# EAGLE board m7102 (EAGLE 4.11)
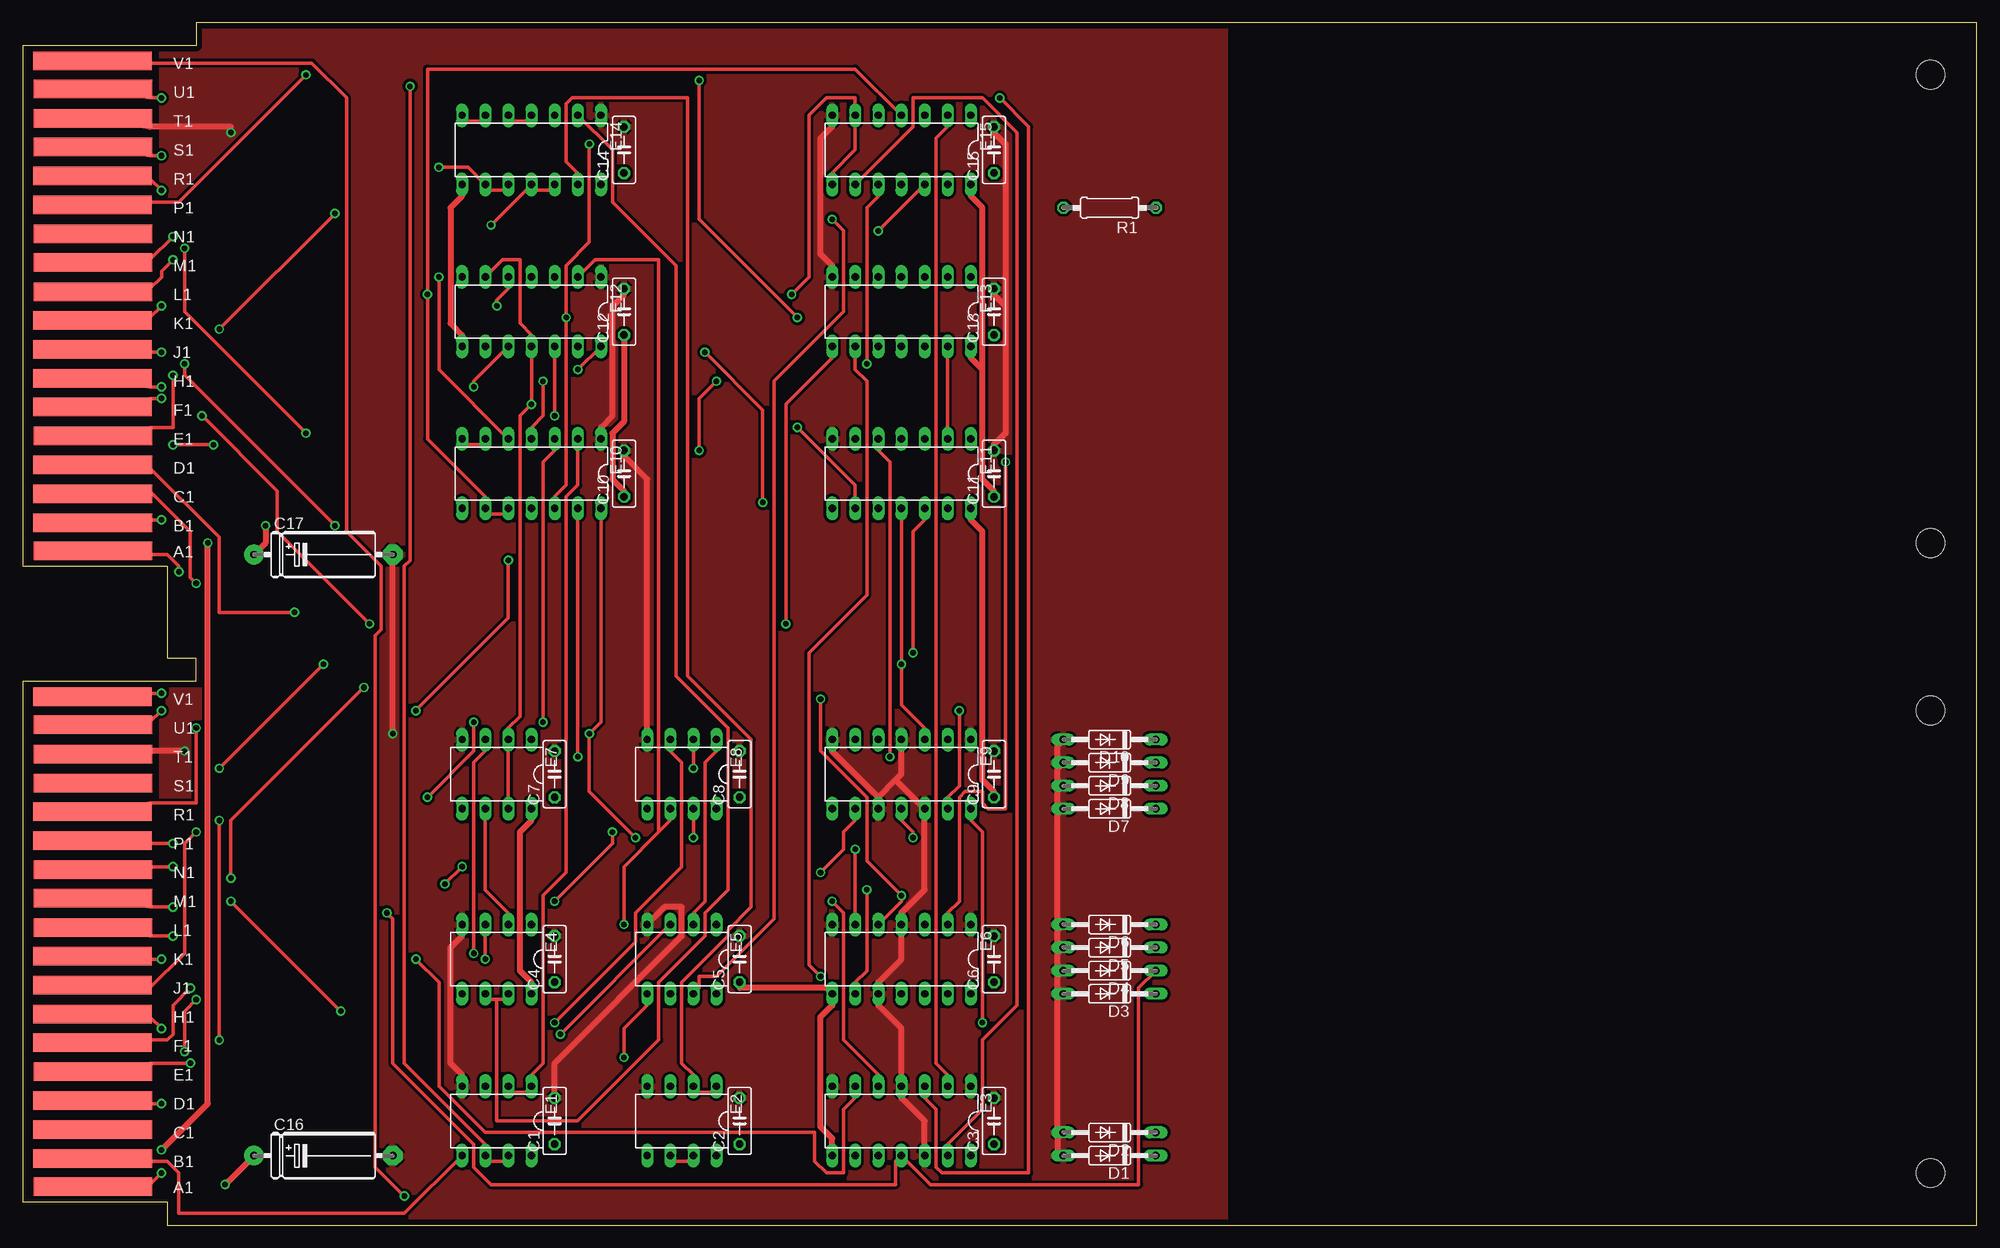
[diagram p0: board, top side]
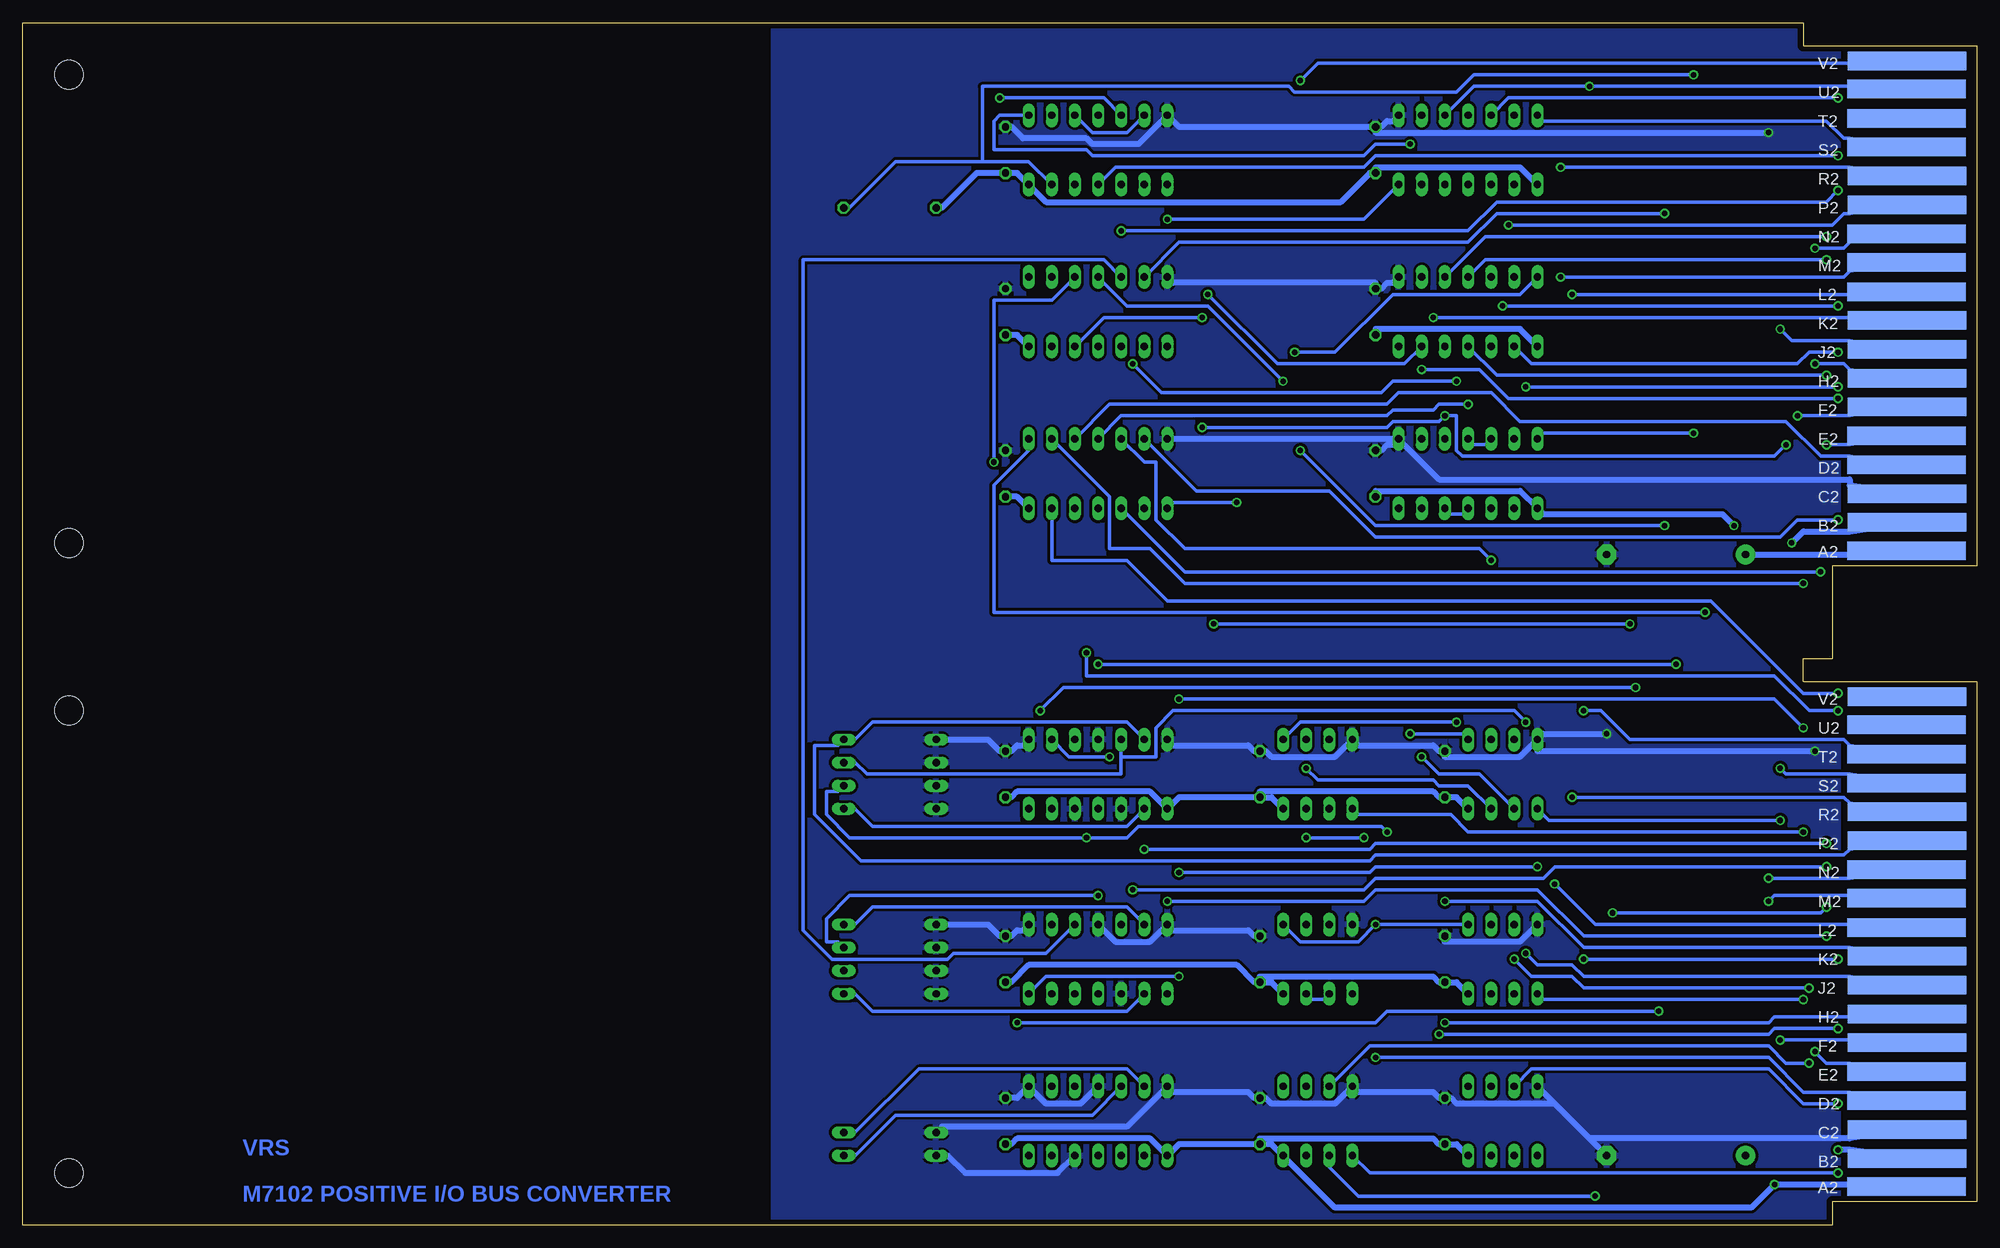
[diagram p1: board, bottom side, seen from below]

Size 214.63 x 132.08 mm. Coordinates in mm from the lower left corner, seen from the top.
Copper layers (1*16): Top 0.035mm / dielectric 1.5mm / Bottom 0.035mm
Design rules "15mils": minimum track width 15mil, minimum drill 24mil, track to track 12mil, track to pad 10mil, pad to pad 10mil, via to via 10mil, smd to smd 10mil, copper to edge 25mil, drill to drill 10mil, minimum pad ring 10mil, minimum via ring 8mil, stop-mask expansion 0mil, vias tented up to drill 0mil, thermal gap 10mil
Net classes: 1 Supply: width 0.635 mm

## Footprints (pad centres in the part's own frame; a part is rotated, then mirrored left to right if it is on the bottom)
C050-025X075 = drill 0.813 octagon: 1 -2.54,0; 2 2.54,0
E15-5 = drill 0.813 pad 2.159 round: + -7.62,0 | drill 0.813 pad 2.159 octagon: - 7.62,0
DO35-10 = drill 0.813 long: A 5.08,0; C -5.08,0
DIL08 = drill 0.813 long: 1 -3.81,-3.81; 2 -1.27,-3.81; 3 1.27,-3.81; 4 3.81,-3.81; 5 3.81,3.81; 6 1.27,3.81; 7 -1.27,3.81; 8 -3.81,3.81
DIL14 = drill 0.813 long: 1 -7.62,-3.81; 2 -5.08,-3.81; 3 -2.54,-3.81; 4 0,-3.81; 5 2.54,-3.81; 6 5.08,-3.81; 7 7.62,-3.81; 8 7.62,3.81; 9 5.08,3.81; 10 2.54,3.81; 11 0,3.81; 12 -2.54,3.81; 13 -5.08,3.81; 14 -7.62,3.81
EDGE-CON4 = smd 13.017 x 2.032: AA1 7.709,4.207; AB1 7.684,7.312; AC1 7.684,10.474; AD1 7.684,13.665; AE1 7.693,16.84; AF1 7.668,20.041; AH1 7.668,23.19; AJ1 7.668,26.34; AK1 7.668,29.515; AL1 7.693,32.69; AM1 7.693,35.89; AN1 7.693,39.04; AP1 7.668,42.24; AR1 7.668,45.39; AS1 7.693,48.565; AT1 7.693,51.74; AU1 7.693,54.94; AV1 7.668,58.026; BA1 7.709,74.057; BB1 7.684,77.162; BC1 7.684,80.324; BD1 7.684,83.515; BE1 7.693,86.69; BF1 7.668,89.891; BH1 7.668,93.04; BJ1 7.668,96.19; BK1 7.668,99.365; BL1 7.693,102.54; BM1 7.693,105.74; BN1 7.693,108.89; BP1 7.668,112.09; BR1 7.668,115.24; BS1 7.693,118.415; BT1 7.693,121.59; BU1 7.693,124.79; BV1 7.668,127.876 | smd 13.017 x 2.032 bottom: AA2 7.69,4.207; AB2 7.668,7.328; AC2 7.668,10.49; AD2 7.693,13.665; AE2 7.693,16.84; AF2 7.642,20.041; AH2 7.642,23.19; AJ2 7.668,26.34; AK2 7.668,29.515; AL2 7.693,32.69; AM2 7.693,35.89; AN2 7.693,39.04; AP2 7.668,42.24; AR2 7.668,45.39; AS2 7.693,48.565; AT2 7.693,51.74; AU2 7.693,54.966; AV2 7.668,58.026; BA2 7.69,74.057; BB2 7.668,77.178; BC2 7.668,80.34; BD2 7.693,83.515; BE2 7.693,86.69; BF2 7.642,89.891; BH2 7.642,93.04; BJ2 7.668,96.19; BK2 7.668,99.365; BL2 7.693,102.54; BM2 7.693,105.74; BN2 7.693,108.89; BP2 7.668,112.09; BR2 7.668,115.24; BS2 7.693,118.415; BT2 7.693,121.59; BU2 7.693,124.816; BV2 7.668,127.876
0207/10 = drill 0.813 octagon: 1 -5.08,0; 2 5.08,0
DOUBLE-LONG = hole 3.175: 209.55,56.515; 209.55,5.715; 209.55,74.93; 209.55,126.365

## Placement (x,y rotation side)
C1  .01uf  [C050-025X075]  58.42,11.43 90 top
C2  .01uf  [C050-025X075]  78.74,11.43 90 top
C3  .01uf  [C050-025X075]  106.68,11.43 90 top
C4  .01uf  [C050-025X075]  58.42,29.21 90 top
C5  .01uf  [C050-025X075]  78.74,29.21 90 top
C6  .01uf  [C050-025X075]  106.68,29.21 90 top
C7  .01uf  [C050-025X075]  58.42,49.53 90 top
C8  .01uf  [C050-025X075]  78.74,49.53 90 top
C9  .01uf  [C050-025X075]  106.68,49.53 90 top
C10  .01uf  [C050-025X075]  66.04,82.55 90 top
C11  .01uf  [C050-025X075]  106.68,82.55 90 top
C12  .01uf  [C050-025X075]  66.04,100.33 90 top
C13  .01uf  [C050-025X075]  106.68,100.33 90 top
C14  .01uf  [C050-025X075]  66.04,118.11 90 top
C15  .01uf  [C050-025X075]  106.68,118.11 90 top
C16  6.8uf  [E15-5]  33.02,7.62 0 top
C17  6.8uf  [E15-5]  33.02,73.66 0 top
D1  D664  [DO35-10]  119.38,7.62 180 top
D2  D664  [DO35-10]  119.38,10.16 180 top
D3  D664  [DO35-10]  119.38,25.4 180 top
D4  D664  [DO35-10]  119.38,27.94 180 top
D5  D664  [DO35-10]  119.38,30.48 180 top
D6  D664  [DO35-10]  119.38,33.02 180 top
D7  D664  [DO35-10]  119.38,45.72 180 top
D8  D664  [DO35-10]  119.38,48.26 180 top
D9  D664  [DO35-10]  119.38,50.8 180 top
D10  D664  [DO35-10]  119.38,53.34 180 top
E1  DS75452N  [DIL08]  52.07,11.43 180 top
E2  DS75452N  [DIL08]  72.39,11.43 180 top
E3  SP384N  [DIL14]  96.52,11.43 180 top
E4  DS75452N  [DIL08]  52.07,29.21 180 top
E5  DS75452N  [DIL08]  72.39,29.21 180 top
E6  SP384N  [DIL14]  96.52,29.21 180 top
E7  DS75452N  [DIL08]  52.07,49.53 180 top
E8  DS75452N  [DIL08]  72.39,49.53 180 top
E9  SP384N  [DIL14]  96.52,49.53 180 top
E10  SP380N  [DIL14]  55.88,82.55 180 top
E11  74H04N  [DIL14]  96.52,82.55 180 top
E12  SP380N  [DIL14]  55.88,100.33 180 top
E13  7416N  [DIL14]  96.52,100.33 180 top
E14  SP380N  [DIL14]  55.88,118.11 180 top
E15  DS8881N  [DIL14]  96.52,118.11 180 top
EDGE  [EDGE-CON4]  0,0 0 top
R1  3.3K  [0207/10]  119.38,111.76 180 top
U$3  OUTLINE-DOUBLE-LONG  [DOUBLE-LONG]  0,0 0 top

## Library data of the parts
C1-C17 R1 = rcl
D1-D10 = diode
E1 E2 E4 E5 E7 E8 E11 E13 = 74xx-jameco
E3 E6 E9 E10 E12 E14 E15 EDGE U$3 = dec-con

## Nets
-15V [Supply]: EDGE.AB2 EDGE.BB2
AN1: D3.C E6.9 EDGE.AN1
AP1: D6.C E6.6 EDGE.AP1
AR1: D5.C E6.5 EDGE.AR1
BAC2D: E12.13 E15.3 E15.6 E15.8
BD2: E11.3 EDGE.BD2
BE2: E11.9 E12.12 EDGE.BE2
D2AC: E4.1 E5.1 E8.6 E12.2
D2DATA: E7.2 E7.7 E8.2 E11.4 E12.6 E12.11 EDGE.BE1
GND [Supply]: C1.2 C2.2 C3.2 C4.2 C5.2 C6.2 C7.2 C8.2 C9.2 C10.2 C11.2 C12.2 C13.2 C14.2 C15.2 C16.- C17.- D1.A D2.A D3.A D4.A D5.A D6.A D7.A D8.A D9.A D10.A E1.4 E2.4 E3.1 E3.4 E3.7 E3.12 E4.4 E5.4 E6.1 E6.4 E6.7 E6.10 E7.4 E8.4 E9.1 E9.4 E9.7 E9.10 E9.12 E10.1 E11.7 E12.1 E13.7 E14.1 E15.7 EDGE.AC2 EDGE.AT1 EDGE.BC2 EDGE.BT1
N$1: D4.C E3.11 EDGE.AM1
N$2: D1.C E3.5 EDGE.AL1
N$3: D2.C E3.6 EDGE.AK1
N$4: E3.2 E15.2
N$5: E3.3 E15.5
N$6: E3.13 E15.9
N$7: E6.14 E13.9
N$8: E6.2 E13.3
N$9: E6.3 E13.5
N$10: E4.3 EDGE.AF1
N$11: E7.5 EDGE.AF2
N$12: E8.5 EDGE.AJ1
N$13: E11.8 E12.7
N$14: D7.C E9.9 EDGE.AL2
N$15: E10.4 E10.5 E15.10 EDGE.BM2
N$16: E10.9 E10.10 E15.4 EDGE.BL2
N$17: E10.11 E10.12 E15.1 EDGE.BK2
N$18: E13.6 EDGE.BJ2
N$19: E13.4 EDGE.BH2
N$20: E13.8 EDGE.BF2
N$21: E4.2 E7.6 E10.13
N$22: E7.1 E8.7 E10.14
N$23: E5.2 E8.1 E10.3
N$24: E9.14 EDGE.AM2
N$25: D10.C E9.6 EDGE.AP2
N$26: E5.3 EDGE.AH1
N$27: E7.3 EDGE.AJ2
N$28: E8.3 EDGE.AH2
N$29: E1.5 EDGE.AB1
N$30: E1.3 EDGE.AD1
N$31: E2.3 EDGE.AE1
N$32: E5.5 EDGE.AD2
N$33: E4.5 EDGE.AE2
N$34: E2.5 EDGE.AA1
N$35: D9.C E9.5 EDGE.AR2
N$36: D8.C E9.11 EDGE.AK2
N$37: E9.13 EDGE.AN2
N$38: E1.6 E1.7 E14.3 EDGE.BU2
N$39: E1.1 E1.2 E10.2
N$40: E14.4 E14.5 EDGE.BU1
N$41: E10.6 E10.7 EDGE.BN2
N$66: E2.1 E2.2 E14.13
N$67: E5.6 E5.7 E14.14
N$68: E2.6 E2.7 EDGE.BV1
N$69: E4.6 E4.7 E14.2
N$70: E14.6 E14.7 EDGE.BS2
N$71: E14.9 E14.10 EDGE.BR2
N$72: E14.11 E14.12 EDGE.BP2
N$74: E9.2 E11.5 EDGE.AT2
N$78: E9.3 E11.11 EDGE.AS2
N$88: E11.6 EDGE.BB1
N$89: E11.10 EDGE.BA1
N$91: E12.4 EDGE.BL1
N$92: E12.5 EDGE.BK1
N$93: E12.3 EDGE.BM1
N$94: E12.14 EDGE.BF1
N$95: E12.10 EDGE.BH1
N$96: E12.9 EDGE.BJ1
N$97: E15.11 EDGE.BS1
N$98: E15.12 EDGE.BR1
N$99: E15.13 EDGE.BP1 R1.1
N$100: E11.2 E13.13 EDGE.BC1
N$101: E11.1 EDGE.BD1
N$102: E11.13 EDGE.AV1
N$103: E11.12 EDGE.AU1
N$104: E13.12 EDGE.BV2
VCC [Supply]: C1.1 C2.1 C3.1 C4.1 C5.1 C6.1 C7.1 C8.1 C9.1 C10.1 C11.1 C12.1 C13.1 C14.1 C15.1 C16.+ C17.+ E1.8 E2.8 E3.8 E4.8 E5.8 E6.8 E7.8 E8.8 E9.8 E10.8 E11.14 E12.8 E13.14 E14.8 E15.14 EDGE.AA2 EDGE.BA2 R1.2

## Tracks (layer width: path | path; a pad name or v marks a point on that pad's centre or on a via)
-15V  (via drill 0.61)
  Top 0.635: v15.24,8.26 20.32,13.34 v20.32,74.93
  Bottom 0.635: v15.24,8.26 13.97,8.26 EDGE.AB2 | v20.32,74.93 19.05,76.2 13.97,76.2 EDGE.BB2
AN1  (via drill 0.61)
  Top 0.381: v16.51,39.37 13.97,39.37 EDGE.AN1 | v92.71,36.83 92.71,27.94 91.44,26.67 E6.9
  Bottom 0.381: E6.9 93.35,23.5 121.29,23.5 123.19,25.4 D3.C | v16.51,39.37 46.36,39.37 47.63,38.1 66.04,38.1 67.31,36.83 v92.71,36.83
AP1  (via drill 0.61)
  Top 0.381: v16.51,41.91 13.97,41.91 EDGE.AP1 | v91.44,41.27 E6.6
  Bottom 0.381: E6.6 93.35,34.92 121.29,34.92 123.19,33.02 D6.C | v16.51,41.91 66.04,41.91 66.68,41.27 v91.44,41.27
AR1  (via drill 0.61)
  Top 0.381: E6.5 96.52,35.56 v96.52,36.2 92.71,40.01 92.71,46.99 87.63,52.07 v87.63,57.78 | v19.05,54.61 19.05,46.35 13.97,46.35 EDGE.AR1
  Bottom 0.381: v96.52,36.2 123.83,36.2 126.37,33.66 126.37,31.11 125.1,31.11 D5.C | v19.05,54.61 22.23,57.78 v87.63,57.78
BAC2D  (via drill 0.61)
  Top 0.381: v84.46,102.23 86.36,104.14 86.36,121.92 88.27,123.83 91.44,123.83 E15.6 91.44,118.11 88.9,115.57 E15.8
  Bottom 0.381: v84.46,102.23 76.84,94.61 62.87,94.61 E12.13 | E15.3 97.16,120.02 93.35,120.02 E15.6
BD2
  Bottom 0.381: E11.3 95.25,90.17 64.77,90.17 63.5,91.44 53.34,91.44 50.17,88.27 20.96,88.27 17.15,84.45 13.97,84.45 EDGE.BD2
BE2  (via drill 0.61)
  Top 0.381: v85.09,87.63 91.44,81.28 E11.9 | v58.42,88.9 E12.12 | v16.51,85.72 v20.96,85.72
  Bottom 0.381: v85.09,87.63 64.77,87.63 64.14,88.27 59.06,88.27 v58.42,88.9 57.15,88.9 57.15,85.09 56.52,84.45 22.23,84.45 v20.96,85.72 | v16.51,85.72 13.97,85.72 EDGE.BE2
D2AC  (via drill 0.61)
  Top 0.381: 69.85,43.18 66.04,39.37 v66.04,33.02 | 69.85,43.18 71.12,44.45 E8.6 | 69.85,43.18 69.85,106.05 62.87,106.05 E12.2
  Bottom 0.381: E4.1 v66.04,33.02 67.95,31.11 74.3,31.11 E5.1
D2DATA  (via drill 0.61)
  Top 0.381: E7.7 E7.2 53.34,54.61 54.61,55.88 54.61,88.9 v55.88,90.17 E12.11 55.88,97.79 54.61,99.06 54.61,106.05 52.71,106.05 E12.6 | v73.66,50.16 E8.2 | v16.51,93.34 16.51,87.63 13.97,87.63 EDGE.BE1
  Bottom 0.381: v73.66,50.16 72.39,48.9 59.69,48.9 59.06,48.26 55.88,48.26 E7.7 | v55.88,90.17 59.06,90.17 59.69,89.53 64.14,89.53 64.77,88.9 93.98,88.9 E11.4 | v16.51,93.34 52.71,93.34 E12.11
GND  (via drill 0.61)
  Top 0.635: 107.95,100.97 107.95,87 106.68,85.72 C11.2 | 107.95,100.97 106.68,102.23 C13.2 | 107.95,100.97 107.95,118.75 106.68,120.02 C15.2 | E10.1 63.5,87.63 64.77,88.9 64.77,100.97 66.04,102.23 C12.2 | E15.7 88.9,120.65 87.63,119.38 87.63,106.68 88.9,105.41 E13.7 | v22.86,120.02 22.86,120.65 13.97,120.65 EDGE.BT1 | E5.4 70.49,34.92 72.39,34.92 72.39,31.75 58.42,17.78 C1.2 | E4.4 48.26,31.75 46.99,30.48 46.99,17.78 48.26,16.51 E1.4 | D10.A 113.67,52.7 113.67,51.44 D9.A 113.67,50.16 113.67,48.9 D8.A 113.67,47.62 113.67,46.35 D7.A 113.67,45.09 113.67,33.66 D6.A 113.67,32.38 113.67,31.11 D5.A 113.67,29.84 113.67,28.57 D4.A 113.67,27.3 113.67,26.04 D3.A 113.67,24.77 113.67,10.79 D2.A 113.67,9.53 113.67,8.26 D1.A | E3.12 99.06,11.43 96.52,13.97 E3.4 96.52,21.59 93.98,24.13 E6.10 93.98,26.67 96.52,29.21 E6.4 96.52,34.29 99.06,36.83 E9.12 95.89,48.9 | 95.89,48.9 96.52,49.53 E9.4 | 95.89,48.9 93.98,46.99 | 93.98,46.99 88.9,52.07 E9.7 | 93.98,46.99 E9.10 | v40.64,53.98 C17.- | v17.78,52.07 13.97,52.07 EDGE.AT1 | C10.2 66.04,84.45 68.58,81.92 E8.4
  Bottom 0.635: C14.2 65.41,120.65 64.77,121.28 64.14,121.28 E14.1 | C14.2 87.63,120.65 E15.7 92.08,118.75 97.16,118.75 97.79,119.38 104.78,119.38 106.05,120.65 C15.2 | C10.2 65.41,85.09 64.77,85.72 64.14,85.72 E10.1 | E10.1 E11.7 | E12.1 64.14,103.5 64.77,103.5 65.41,102.87 C12.2 66.04,103.5 88.27,103.5 E13.7 | EDGE.BC2 13.97,81.28 13.97,81.92 59.06,81.92 E10.1 | v22.86,120.02 66.04,120.02 C14.2 | E4.4 50.17,31.11 58.42,31.11 C4.2 | 42.55,9.53 46.36,13.34 | 46.36,13.34 E1.4 | 42.55,9.53 C16.- | 42.55,9.53 13.97,9.53 EDGE.AC2 | 46.36,13.34 57.15,13.34 57.79,13.97 C1.2 59.06,13.97 59.69,14.61 67.95,14.61 E2.4 70.49,13.34 77.47,13.34 78.11,13.97 C2.2 79.38,13.97 80.01,14.61 88.27,14.61 E3.7 93.35,10.79 113.67,10.79 D2.A | E9.1 104.78,52.7 105.41,52.7 106.05,52.07 C9.2 107.32,52.07 108.59,53.34 D10.A | E6.1 104.78,32.38 105.41,32.38 106.05,31.75 C6.2 107.32,31.75 108.59,33.02 D6.A | C5.2 79.38,31.75 80.01,32.38 88.27,32.38 E6.7 90.81,31.11 94.62,31.11 E6.4 | C3.2 105.41,13.97 E3.1 102.24,13.34 98.43,13.34 E3.4 | E9.7 88.27,52.7 80.01,52.7 79.38,52.07 C8.2 78.11,52.07 77.47,51.44 70.49,51.44 E8.4 67.95,52.7 59.69,52.7 59.06,52.07 C7.2 58.42,51.44 50.17,51.44 E7.4 | v40.64,53.98 47.63,53.98 E7.4 | v17.78,52.07 48.26,52.07 E7.4 | D1.A 113.03,7.62 111.13,5.71 100.97,5.71 E3.12
  pour Bottom (isolate 0.305): 15.24,0 132.08,0 132.08,132.08 15.24,132.08
  pour Top (isolate 0.305): 15.24,0 132.08,0 132.08,132.08 15.24,132.08
N$1  (via drill 0.61)
  Top 0.381: D4.C 122.56,26.04 122.56,4.45 99.7,4.45 E3.11 95.89,6.99 95.89,4.45 51.44,4.45 49.53,6.35 49.53,8.89 40.64,17.78 40.64,33.66 v40.01,34.29 | v16.51,34.92 13.97,34.92 EDGE.AM1
  Bottom 0.381: v16.51,34.92 17.15,34.29 v40.01,34.29
N$2  (via drill 0.61)
  Top 0.381: v16.51,31.75 13.97,31.75 EDGE.AL1 | v88.9,35.56 90.17,34.29 90.17,20.32 93.98,16.51 E3.5
  Bottom 0.381: D1.C 123.19,7.62 118.75,12.06 97.16,12.06 E3.5 | v16.51,31.75 43.18,31.75 48.26,36.83 66.04,36.83 67.31,35.56 v88.9,35.56
N$3  (via drill 0.61)
  Top 0.381: v15.24,29.21 13.97,29.21 EDGE.AK1 | v43.18,29.21 45.72,26.67 45.72,15.24 50.8,10.16 87,10.16 87,6.99 88.27,5.71 90.17,5.71 90.17,12.7 91.44,13.97 E3.6
  Bottom 0.381: D2.C 123.19,10.16 116.21,17.14 93.35,17.14 E3.6 | v15.24,29.21 v43.18,29.21
N$4
  Top 0.381: E3.2 101.6,16.51 100.33,17.78 100.33,119.38 101.6,120.65 E15.2
N$5  (via drill 0.61)
  Top 0.381: v107.32,123.83 110.49,120.65 110.49,5.71 100.97,5.71 100.33,6.35 100.33,12.7 99.06,13.97 E3.3
  Bottom 0.381: v107.32,123.83 95.89,123.83 E15.5
N$6
  Top 0.381: E3.13 101.6,8.89 105.41,12.7 105.41,20.32 109.22,24.13 109.22,120.02 105.41,123.83 97.79,123.83 97.79,120.65 E15.9
N$7  (via drill 0.61)
  Top 0.381: v87.63,27.3 86.36,28.57 86.36,62.87 92.71,69.22 92.71,92.71 91.44,93.98 E13.9
  Bottom 0.381: v87.63,27.3 102.24,27.3 E6.14
N$8  (via drill 0.61)
  Top 0.381: v107.95,83.82 107.95,45.72 106.05,45.72 105.41,46.35 105.41,47.62 103.51,47.62 102.87,46.99 102.87,35.56 101.6,34.29 E6.2
  Bottom 0.381: v107.95,83.82 107.95,101.6 101.6,101.6 E13.3
N$9
  Bottom 0.381: E6.3 102.24,29.84 112.4,29.84 113.03,29.21 125.73,29.21 128.91,32.38 128.91,106.05 95.89,106.05 E13.5
N$10  (via drill 0.61)
  Top 0.381: v18.42,26.04 16.51,24.13 16.51,20.95 15.88,20.32 13.97,20.32 EDGE.AF1 | v50.8,29.21 E4.3
  Bottom 0.381: v50.8,29.21 48.9,27.3 44.45,27.3 43.18,26.04 v18.42,26.04
N$11  (via drill 0.61)
  Top 0.381: v21.59,20.32 v21.59,44.45
  Bottom 0.381: v21.59,44.45 46.99,44.45 E7.5 | v21.59,20.32 13.97,20.32 EDGE.AF2
N$12  (via drill 0.61)
  Top 0.381: v19.05,43.18 17.78,41.91 17.78,29.84 13.97,26.04 EDGE.AJ1
  Bottom 0.381: v19.05,43.18 55.88,43.18 57.79,45.09 67.95,45.09 E8.5
N$13  (via drill 0.61)
  Top 0.381: v74.93,95.89 81.28,89.53 v81.28,79.38
  Bottom 0.381: v74.93,95.89 70.49,95.89 64.14,102.23 50.17,102.23 E12.7 | v81.28,79.38 88.27,79.38 E11.8
N$14  (via drill 0.61)
  Top 0.381: v46.36,37.47 v48.26,39.37 | v87.63,38.73 90.17,41.27 90.17,43.18 91.44,44.45 E9.9
  Bottom 0.381: E9.9 93.35,43.81 121.29,43.81 123.19,45.72 D7.C | v46.36,37.47 41.91,33.02 13.97,33.02 EDGE.AL2 | v48.26,39.37 66.04,39.37 66.68,38.73 v87.63,38.73
N$15  (via drill 0.61)
  Top 0.381: v92.71,94.61 92.71,111.76 93.98,113.03 E15.10 | v57.15,92.71 57.15,88.9 55.88,87.63 E10.4 | v45.72,104.14 45.72,93.98 E10.5
  Bottom 0.381: E10.5 53.98,85.72 55.25,85.72 E10.4 | v92.71,94.61 89.54,91.44 65.41,91.44 64.14,92.71 v57.15,92.71 | v45.72,104.14 14.61,104.14 13.97,104.78 EDGE.BM2
N$16  (via drill 0.61)
  Top 0.381: E10.10 52.71,78.11 51.44,78.11 E10.9 50.8,80.01 44.45,86.36 v44.45,102.23 44.45,127 91.44,127 E15.4
  Bottom 0.381: v44.45,102.23 13.97,102.23 EDGE.BL2
N$17  (via drill 0.61)
  Top 0.381: v62.23,118.75 62.23,107.95 59.69,105.41 v59.69,99.69 59.69,81.28 58.42,80.01 E10.12
  Bottom 0.381: E10.11 56.52,78.11 57.79,78.11 E10.12 | v62.23,118.75 66.04,118.75 67.31,117.47 97.16,117.47 97.79,118.11 107.95,118.11 107.95,121.28 107.32,121.92 E15.1 | v59.69,99.69 13.97,99.69 EDGE.BK2
N$18  (via drill 0.61)
  Top 0.381: v21.59,98.42 v34.29,111.12
  Bottom 0.381: v34.29,111.12 52.71,111.12 55.88,107.95 87.63,107.95 E13.6 | v21.59,98.42 20.32,97.16 13.97,97.16 EDGE.BJ2
N$19  (via drill 0.61)
  Top 0.381: v76.2,92.71 74.3,90.81 v74.3,85.09 | v34.29,76.83 17.78,93.34 v17.78,94.61
  Bottom 0.381: v76.2,92.71 84.46,100.97 93.35,100.97 E13.4 | v74.3,85.09 66.04,76.83 v34.29,76.83 | v17.78,94.61 14.61,94.61 13.97,93.98 EDGE.BH2
N$20  (via drill 0.61)
  Top 0.381: v83.82,66.04 83.82,90.17 88.9,95.25 E13.8 | v38.1,66.04 27.94,76.2 27.94,80.64 v19.69,88.9
  Bottom 0.381: v38.1,66.04 v83.82,66.04 | v19.69,88.9 13.97,88.9 EDGE.BF2
N$21  (via drill 0.61)
  Top 0.381: E4.2 53.34,34.29 50.8,36.83 E7.6 | v60.96,51.44 E10.13
  Bottom 0.381: v60.96,51.44 59.06,49.53 54.61,49.53 E7.6
N$22  (via drill 0.61)
  Top 0.381: E10.14 63.5,55.24 v62.23,53.98 62.23,47.62 v67.31,42.55 | v73.66,42.55 E8.7
  Bottom 0.381: v62.23,53.98 56.52,53.98 E7.1 | v67.31,42.55 v73.66,42.55
N$23  (via drill 0.61)
  Top 0.381: E5.2 73.66,34.29 74.93,35.56 74.93,50.8 76.2,52.07 E8.1 | v57.15,55.24 57.15,83.82 58.42,85.09 E10.3
  Bottom 0.381: v57.15,55.24 74.3,55.24 E8.1
N$24  (via drill 0.61)
  Top 0.381: v105.41,22.23 105.41,43.18 104.14,44.45 E9.14 | v22.86,35.56 v34.93,23.5
  Bottom 0.381: v105.41,22.23 66.04,22.23 64.77,23.5 v34.93,23.5 | v22.86,35.56 22.23,36.2 13.97,36.2 EDGE.AM2
N$25
  Bottom 0.381: E9.6 93.35,55.24 121.29,55.24 123.19,53.34 D10.C 125.1,52.7 127.64,52.7 127.64,45.09 122.56,40.01 66.68,40.01 66.04,40.64 14.61,40.64 13.97,41.27 EDGE.AP2
N$26  (via drill 0.61)
  Top 0.381: v15.24,21.59 13.97,22.86 EDGE.AH1 | v59.06,20.95 E5.3
  Bottom 0.381: v59.06,20.95 22.86,20.95 22.23,21.59 v15.24,21.59
N$27  (via drill 0.61)
  Top 0.381: v49.53,29.84 49.53,50.8 50.8,52.07 E7.3
  Bottom 0.381: v49.53,29.84 48.26,28.57 44.45,28.57 43.18,27.3 13.97,27.3 EDGE.AJ2
N$28  (via drill 0.61)
  Top 0.381: v58.42,22.23 67.31,31.11 67.31,34.29 72.39,39.37 72.39,50.8 71.12,52.07 E8.3
  Bottom 0.381: v58.42,22.23 22.86,22.23 22.23,22.86 13.97,22.86 EDGE.AH2
N$29
  Top 0.381: E1.5 41.91,1.27 17.15,1.27 17.15,5.71 15.88,6.99 13.97,6.99 EDGE.AB1
N$30  (via drill 0.61)
  Top 0.381: v15.24,13.34 13.97,13.34 EDGE.AD1
  Bottom 0.381: v15.24,13.34 19.05,13.34 22.86,17.14 48.9,17.14 E1.3
N$31  (via drill 0.61)
  Top 0.381: v18.42,17.78 13.97,17.78 EDGE.AE1
  Bottom 0.381: v18.42,17.78 20.96,17.78 22.86,19.68 66.68,19.68 E2.3
N$32  (via drill 0.61)
  Top 0.381: v66.04,18.41 66.04,21.59 68.58,24.13 E5.5
  Bottom 0.381: v66.04,18.41 22.86,18.41 19.05,14.61 13.97,14.61 EDGE.AD2
N$33  (via drill 0.61)
  Top 0.381: v19.05,24.77 17.78,23.5 v17.78,19.05
  Bottom 0.381: v19.05,24.77 47.63,24.77 E4.5 | v17.78,19.05 16.51,17.78 13.97,17.78 EDGE.AE2
N$34  (via drill 0.61)
  Top 0.381: v15.24,5.71 13.97,4.45 EDGE.AA1
  Bottom 0.381: v15.24,5.71 66.68,5.71 E2.5
N$35  (via drill 0.61)
  Top 0.381: v44.45,46.99 49.53,52.07 v49.53,55.24
  Bottom 0.381: 93.98,51.44 93.98,49.53 121.92,49.53 123.19,50.8 D9.C | 93.98,51.44 E9.5 | v44.45,46.99 14.61,46.99 13.97,46.35 EDGE.AR2 | v49.53,55.24 50.8,56.52 88.27,56.52 90.17,54.61 90.17,51.44 93.98,51.44
N$36  (via drill 0.61)
  Top 0.381: v97.79,42.55 97.79,43.18 96.52,44.45 E9.11 | v58.42,35.56 64.77,41.91 v64.77,43.18
  Bottom 0.381: D8.C 125.1,47.62 126.37,47.62 126.37,45.09 123.83,42.55 v97.79,42.55 93.35,42.55 92.08,43.81 65.41,43.81 v64.77,43.18 | v58.42,35.56 48.26,35.56 43.18,30.48 13.97,30.48 EDGE.AK2
N$37  (via drill 0.61)
  Top 0.381: v102.87,56.52 102.87,48.26 101.6,46.99 E9.13 | v37.47,59.05 22.86,44.45 v22.86,38.1
  Bottom 0.381: v102.87,56.52 100.33,59.05 v37.47,59.05 | v22.86,38.1 13.97,38.1 EDGE.AN2
N$38  (via drill 0.61)
  Top 0.381: E1.7 52.71,6.99 51.44,6.99 E1.6 50.8,8.89 41.91,17.78 41.91,72.39 42.55,73.03 v42.55,125.09
  Bottom 0.381: E14.3 55.25,125.09 v42.55,125.09 13.97,125.09 EDGE.BU2
N$39
  Top 0.381: E1.2 53.98,14.61 55.25,14.61 E1.1 55.88,16.51 57.15,17.78 57.15,36.2 59.69,38.73 59.69,80.01 60.96,81.28 E10.2
N$40  (via drill 0.61)
  Top 0.381: E14.5 53.98,121.28 55.25,121.28 E14.4 | v15.24,123.83 13.97,123.83 EDGE.BU1
  Bottom 0.381: v15.24,123.83 51.44,123.83 E14.5
N$41  (via drill 0.61)
  Top 0.381: E10.7 48.9,85.72 50.17,85.72 E10.6 | v31.12,87 17.78,100.33 v17.78,107.31
  Bottom 0.381: v31.12,87 47.63,87 E10.7 | v17.78,107.31 14.61,107.31 13.97,107.95 EDGE.BN2
N$66
  Top 0.381: E2.1 75.57,14.61 74.3,14.61 E2.2 73.66,16.51 72.39,17.78 72.39,26.67 77.47,31.75 77.47,32.38 80.01,34.92 80.01,53.34 73.03,60.33 73.03,123.83 60.33,123.83 59.69,123.19 59.69,116.84 60.96,115.57 E14.13
N$67  (via drill 0.61)
  Top 0.381: v88.9,110.49 90.17,109.22 90.17,100.33 82.55,92.71 82.55,33.66 76.2,27.3 74.3,27.3 74.3,26.04 E5.7
  Bottom 0.381: E5.6 71.76,24.77 73.03,24.77 E5.7 | v88.9,110.49 67.31,110.49 E14.14
N$68  (via drill 0.61)
  Top 0.381: E2.6 71.76,6.99 73.03,6.99 E2.7 | v41.91,3.17 38.74,6.35 38.74,64.77 39.37,65.41 39.37,72.39 35.56,76.2 35.56,123.83 31.75,127.64 13.97,127.64 EDGE.BV1
  Bottom 0.381: v41.91,3.17 67.95,3.17 71.12,6.35 E2.6
N$69
  Top 0.381: 52.07,24.77 52.71,24.77 E4.7 | 52.07,24.77 51.44,24.77 E4.6 | 52.07,24.77 52.07,11.43 60.96,11.43 69.85,20.32 69.85,26.67 74.93,31.75 74.93,34.29 77.47,36.83 77.47,54.61 71.76,60.33 71.76,105.41 64.77,112.39 64.77,118.11 E14.2
N$70
  Top 0.381: E14.7 48.9,121.28 50.17,121.28 E14.6
  Bottom 0.381: E14.7 47.63,121.28 16.51,121.28 14.61,119.38 13.97,119.38 EDGE.BS2
N$71  (via drill 0.61)
  Top 0.381: E14.10 52.71,113.67 51.44,113.67 E14.9 48.9,116.2 v45.72,116.2
  Bottom 0.381: v45.72,116.2 13.97,116.2 EDGE.BR2
N$72  (via drill 0.61)
  Top 0.381: E14.12 57.79,113.67 56.52,113.67 E14.11 v51.44,109.86
  Bottom 0.381: v51.44,109.86 15.88,109.86 14.61,111.12 13.97,111.12 EDGE.BP2
N$74  (via drill 0.61)
  Top 0.381: v95.25,51.44 95.25,83.82 93.98,85.09 E11.5 | v43.18,56.52 53.34,66.67 v53.34,73.03
  Bottom 0.381: v95.25,51.44 99.7,51.44 E9.2 | v43.18,56.52 41.28,56.52 38.1,53.34 14.61,53.34 13.97,52.7 EDGE.AT2 | v53.34,73.03 54.61,74.3 87,74.3 90.17,77.47 90.17,83.82 91.44,83.82 E11.5
N$78  (via drill 0.61)
  Top 0.381: E9.3 99.06,54.61 96.52,57.15 v96.52,61.59 E11.11 | v21.59,50.16 v33.02,61.59
  Bottom 0.381: v33.02,61.59 v96.52,61.59 | v21.59,50.16 20.96,49.53 13.97,49.53 EDGE.AS2
N$88  (via drill 0.61)
  Top 0.381: v15.24,77.47 13.97,77.47 EDGE.BB1
  Bottom 0.381: v15.24,77.47 19.69,77.47 21.59,75.56 66.04,75.56 71.12,80.64 85.73,80.64 E11.6
N$89  (via drill 0.61)
  Top 0.381: v17.15,71.75 17.15,72.39 15.88,73.66 13.97,73.66 EDGE.BA1
  Bottom 0.381: v17.15,71.75 87,71.75 E11.10
N$91  (via drill 0.61)
  Top 0.381: v16.51,106.05 15.24,104.78 15.24,104.14 13.97,102.87 EDGE.BL1
  Bottom 0.381: v16.51,106.05 53.98,106.05 E12.4
N$92  (via drill 0.61)
  Top 0.381: v52.07,100.97 52.07,101.6 53.34,102.87 E12.5 | v15.24,100.97 13.97,99.69 EDGE.BK1
  Bottom 0.381: v15.24,100.97 v52.07,100.97
N$93  (via drill 0.61)
  Top 0.381: v16.51,108.58 13.97,106.05 EDGE.BM1
  Bottom 0.381: v16.51,108.58 53.98,108.58 E12.3
N$94  (via drill 0.61)
  Top 0.381: v15.24,90.81 13.97,90.81 EDGE.BF1 | v60.96,93.98 E12.14
  Bottom 0.381: v60.96,93.98 54.61,93.98 51.44,90.81 v15.24,90.81
N$95  (via drill 0.61)
  Top 0.381: v49.53,92.08 49.53,92.71 E12.10 | v15.24,92.08 13.97,92.08 EDGE.BH1
  Bottom 0.381: v15.24,92.08 v49.53,92.08
N$96  (via drill 0.61)
  Top 0.381: v15.24,95.89 13.97,95.89 EDGE.BJ1
  Bottom 0.381: v15.24,95.89 18.42,95.89 19.69,94.61 48.9,94.61 E12.9
N$97  (via drill 0.61)
  Top 0.381: v15.24,117.47 13.97,117.47 EDGE.BS1
  Bottom 0.381: v15.24,117.47 66.04,117.47 67.31,116.2 94.62,116.2 E15.11
N$98  (via drill 0.61)
  Top 0.381: v15.24,113.67 13.97,114.94 EDGE.BR1 | v93.98,109.22 E15.12
  Bottom 0.381: v93.98,109.22 55.88,109.22 52.71,112.39 16.51,112.39 v15.24,113.67
N$99  (via drill 0.61)
  Top 0.381: v31.12,126.36 17.15,112.39 13.97,112.39 EDGE.BP1
  Bottom 0.381: 109.22,116.84 118.75,116.84 123.83,111.76 R1.1 | 109.22,116.84 104.14,116.84 E15.13 | 109.22,116.84 109.22,125.09 75.57,125.09 74.93,124.46 57.15,124.46 55.25,126.36 v31.12,126.36
N$100  (via drill 0.61)
  Top 0.381: E11.2 E13.13 | v19.05,70.48 18.42,71.12 18.42,76.2 13.97,80.64 EDGE.BC1
  Bottom 0.381: v19.05,70.48 87,70.48 90.81,74.3 95.25,74.3 95.25,80.01 E11.2
N$101  (via drill 0.61)
  Top 0.381: v29.85,67.31 21.59,67.31 21.59,75.56 13.97,83.19 EDGE.BD1
  Bottom 0.381: v29.85,67.31 107.95,67.31 107.95,81.28 104.14,85.09 E11.1
N$102  (via drill 0.61)
  Top 0.381: v15.24,58.42 13.97,58.42 EDGE.AV1
  Bottom 0.381: v15.24,58.42 19.05,58.42 29.21,68.58 88.9,68.58 93.35,73.03 101.6,73.03 E11.13
N$103  (via drill 0.61)
  Top 0.381: v97.79,62.87 97.79,76.2 99.06,77.47 E11.12 | v15.24,56.52 13.97,55.24 EDGE.AU1
  Bottom 0.381: v97.79,62.87 97.79,60.33 22.23,60.33 18.42,56.52 v15.24,56.52
N$104  (via drill 0.61)
  Top 0.381: v85.09,99.69 74.3,110.49 v74.3,125.73
  Bottom 0.381: v85.09,99.69 95.89,99.69 E13.12 | v74.3,125.73 72.39,127.64 13.97,127.64 EDGE.BV2
VCC  (via drill 0.61)
  Top 0.635: C5.1 78.74,26.04 88.27,26.04 E6.8 88.9,24.13 87.63,22.86 87.63,10.79 88.9,9.53 E3.8 | v22.23,4.45 C16.+ | C10.1 66.04,80.64 64.77,81.92 64.77,87 66.04,88.27 C12.1 | E14.8 48.26,113.03 46.99,111.76 46.99,99.06 48.26,97.79 E12.8 | v26.67,76.83 26.67,74.93 C17.+ | 105.41,93.98 105.41,81.92 106.68,80.64 C11.1 | 105.41,93.98 104.14,95.25 E13.14 | 105.41,93.98 105.41,111.76 104.14,113.03 E15.14 | E11.14 104.14,77.47 105.41,76.2 105.41,48.9 106.68,47.62 C9.1 | E4.8 55.88,26.67 54.61,27.94 54.61,43.18 55.88,44.45 E7.8
  Bottom 0.635: E4.8 57.15,26.67 C4.1 59.06,26.67 59.69,27.3 78.74,27.3 C5.1 | E5.8 77.47,26.67 C5.1 | C6.1 106.05,26.67 104.14,28.57 81.28,28.57 79.38,26.67 C5.1 | EDGE.AA2 13.97,4.45 v22.23,4.45 24.77,1.91 70.49,1.91 E2.8 77.47,8.89 C2.1 | E1.8 57.15,8.89 C1.1 59.06,8.89 59.69,9.53 78.74,9.53 C2.1 | C2.1 87.63,8.89 E3.8 90.81,9.53 105.41,9.53 106.05,8.89 C3.1 | C17.+ 13.97,73.66 EDGE.BA2 | E14.8 50.17,116.2 66.04,116.2 C14.1 66.68,115.57 69.85,112.39 102.24,112.39 E15.14 105.41,115.57 C15.1 109.86,115.57 113.67,111.76 R1.2 | C10.1 66.04,80.64 50.17,80.64 E10.8 47.63,78.11 27.94,78.11 v26.67,76.83 | E12.8 50.17,98.42 66.04,98.42 C12.1 | E11.14 105.41,80.01 C11.1 | E13.14 105.41,97.79 C13.1 | E7.8 57.15,46.99 C7.1 59.06,46.99 59.69,47.62 78.74,47.62 C8.1 | E8.8 77.47,46.99 C8.1 | C8.1 87.63,46.99 E9.8 90.81,47.62 105.41,47.62 106.05,46.99 C9.1

## Text on the board
Bottom: VRS | M7102 POSITIVE I/O BUS CONVERTER